# EAGLE board Proiect_TSC v166 (EAGLE 9.7.0)
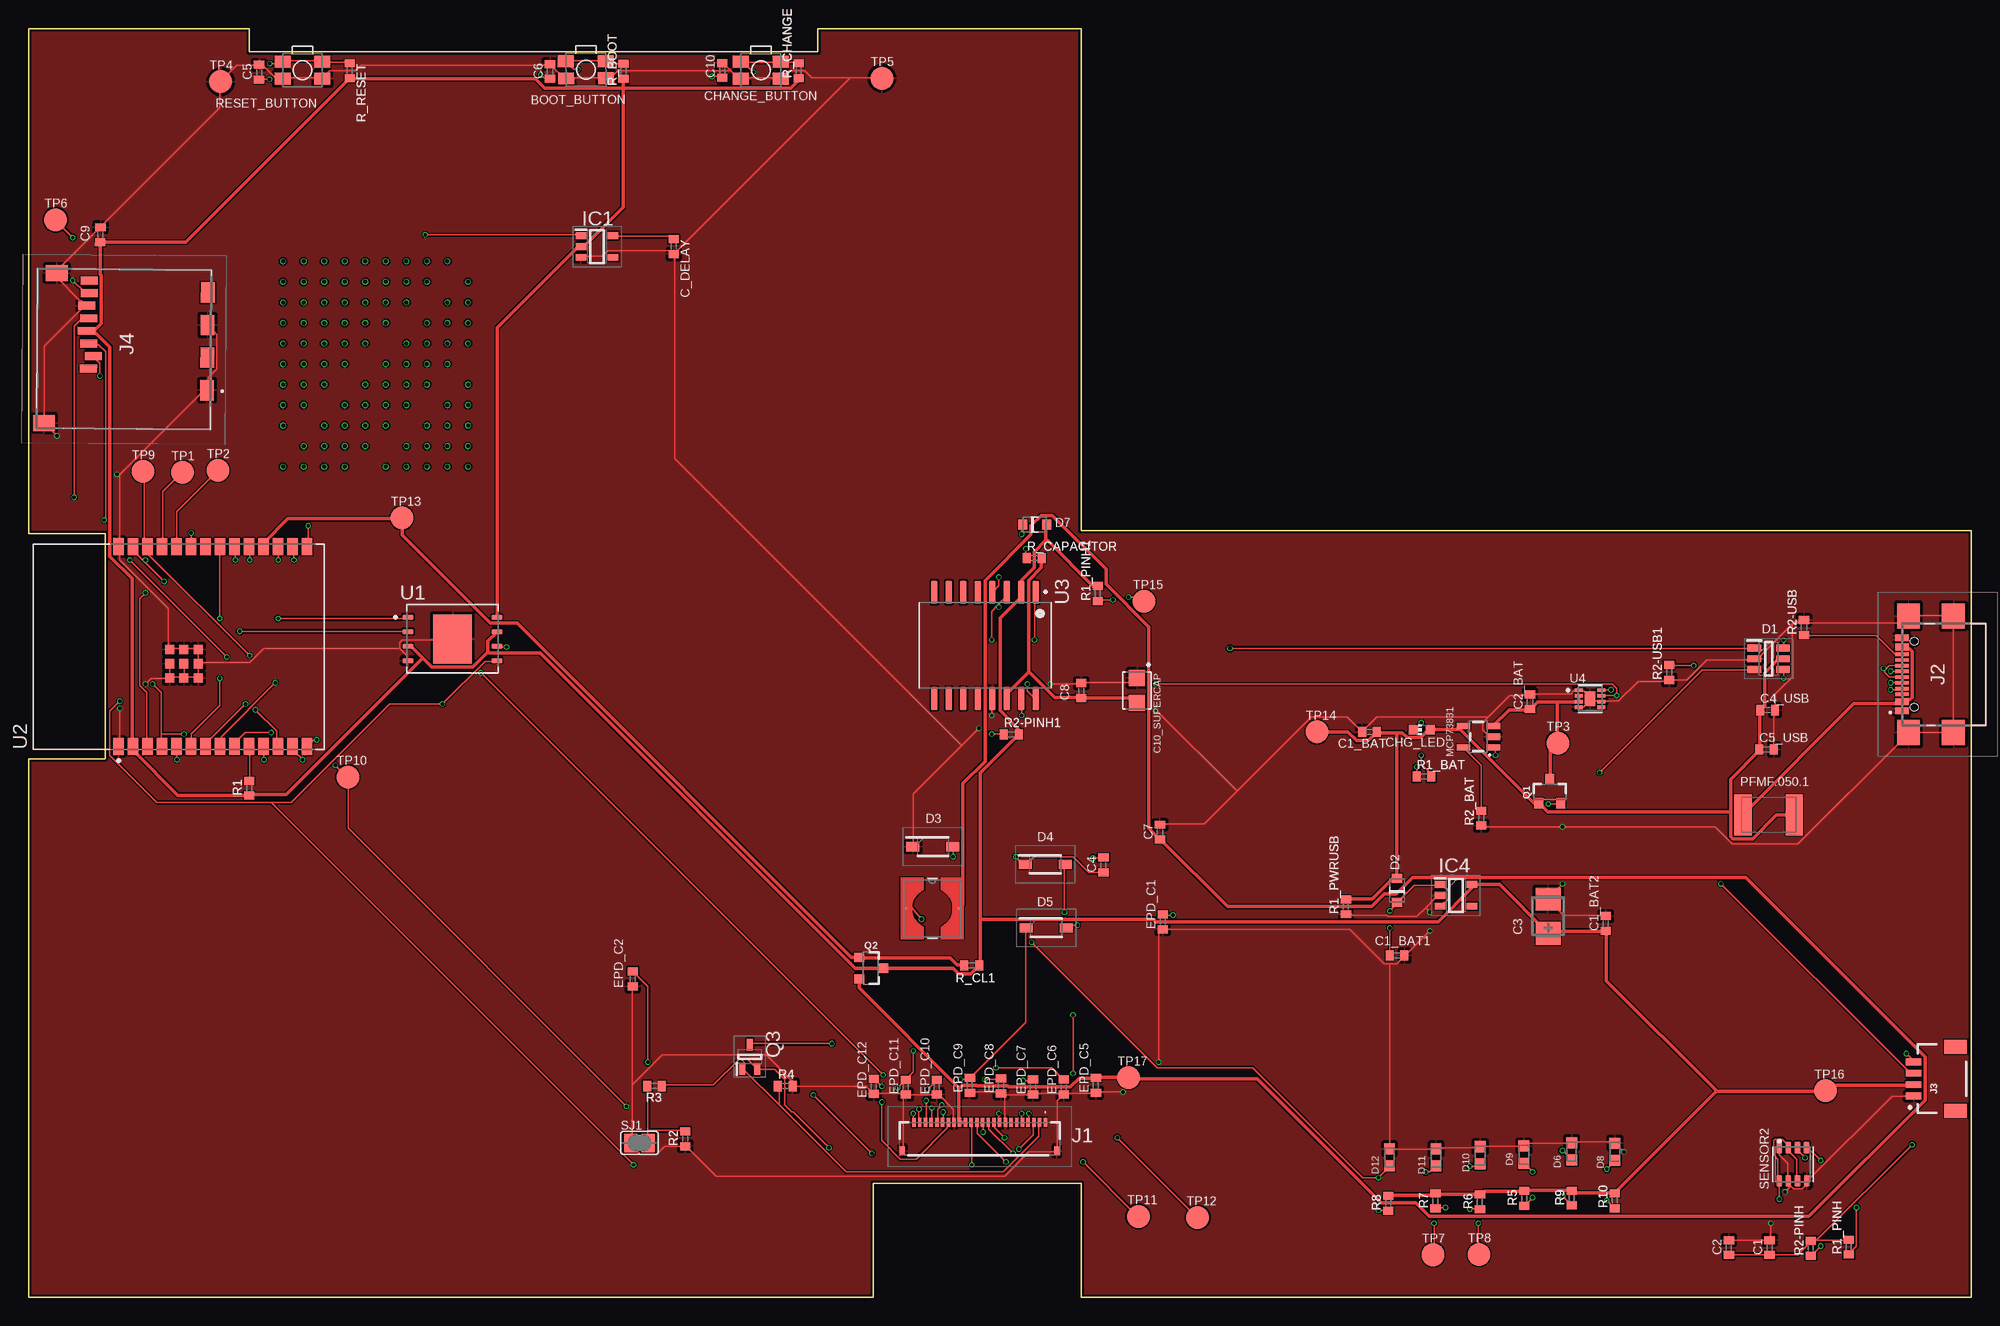
[diagram p0: board, top side]
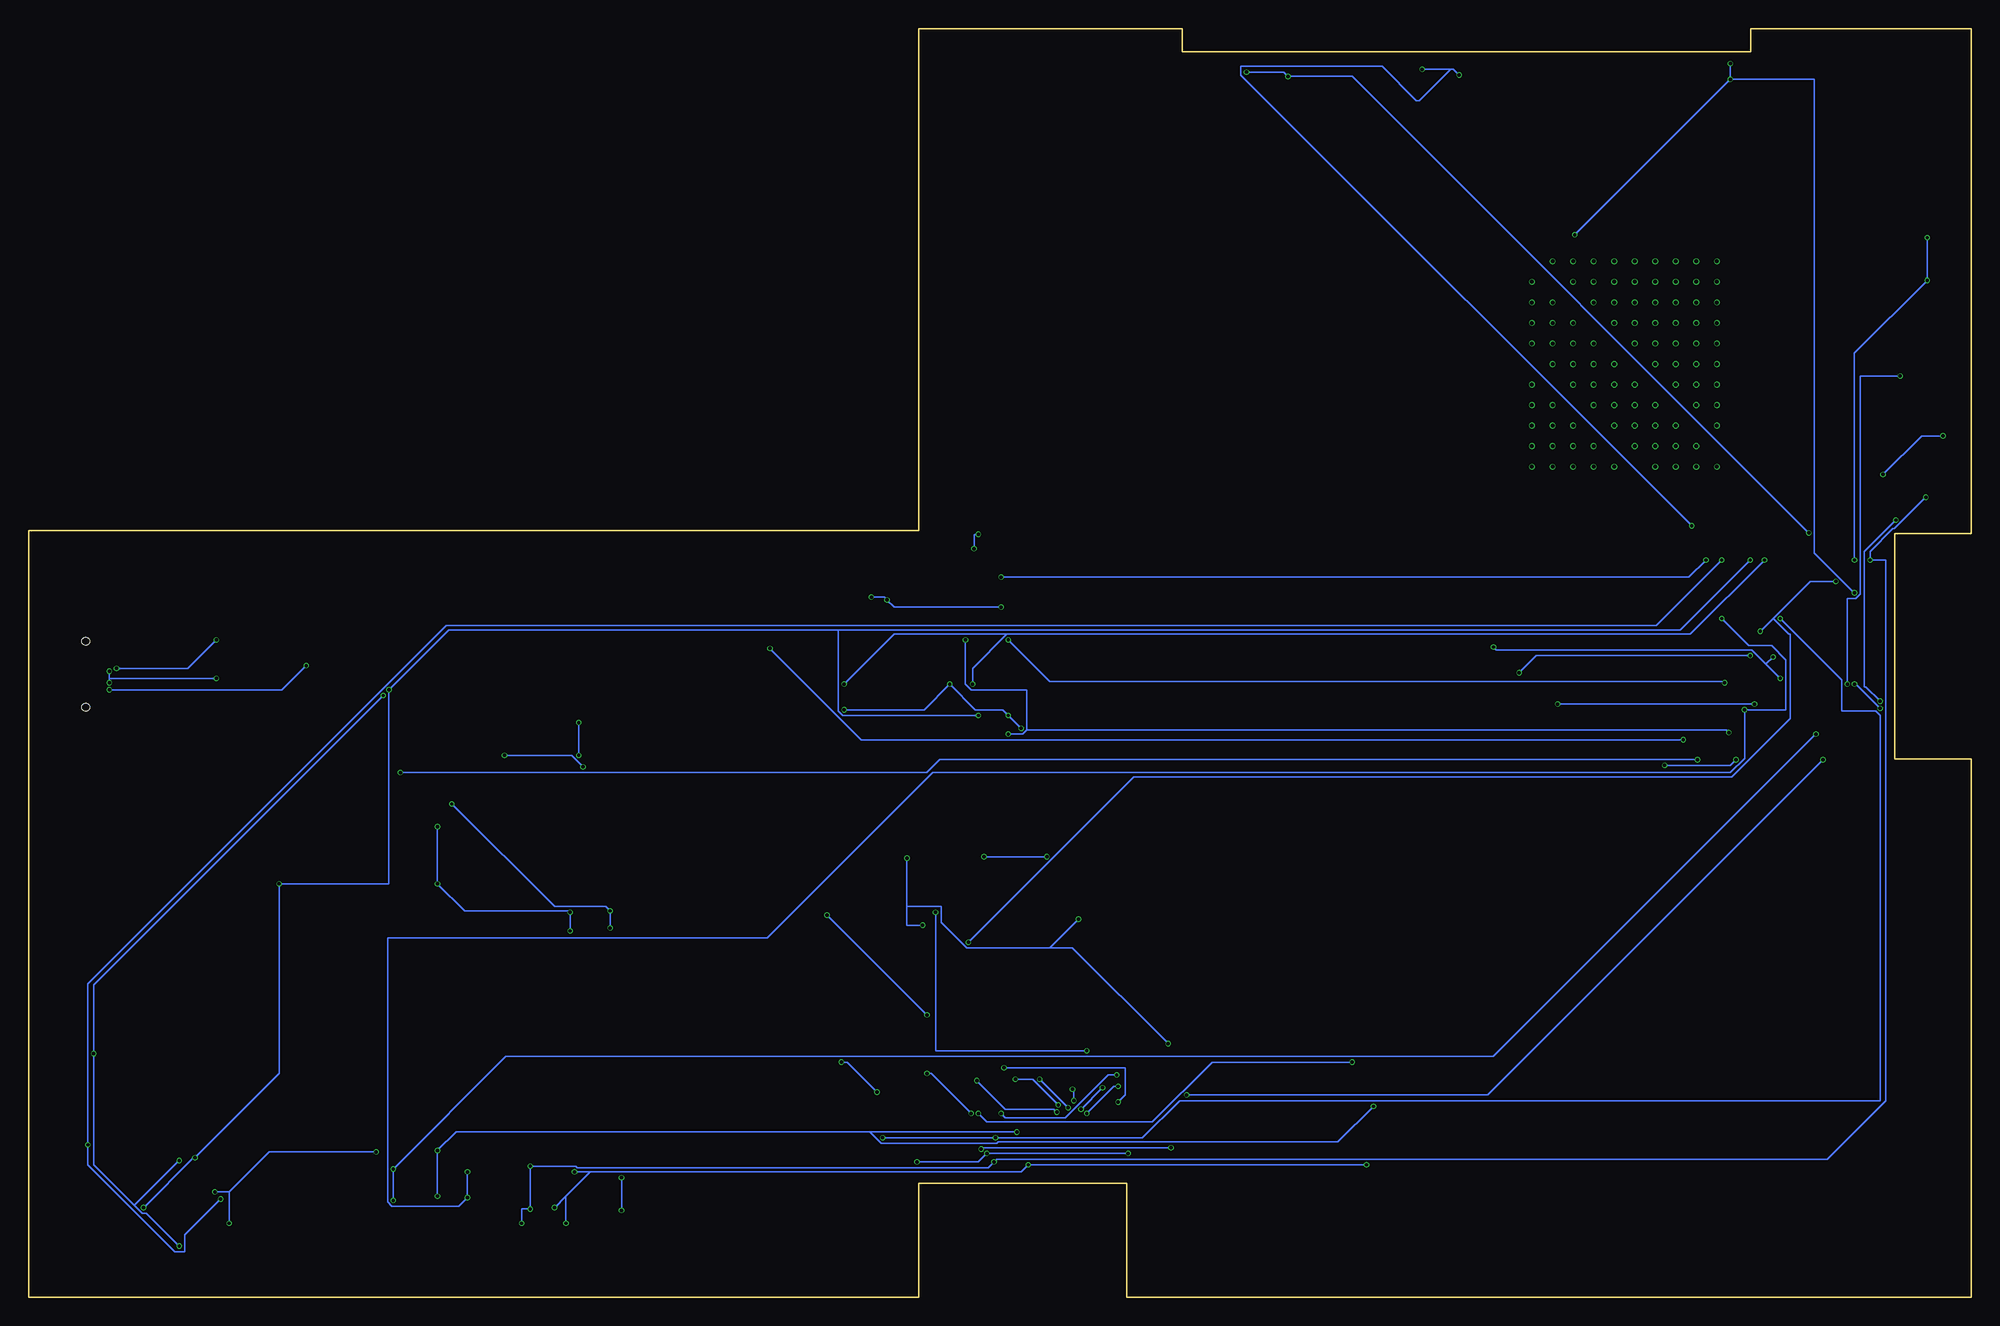
[diagram p1: board, bottom side, seen from below]

Size 170.2 x 111.2 mm. Coordinates in mm from the lower left corner, seen from the top.
Outline: 0,0 74,0 74,10 92.2,10 92.2,0 170.2,0 170.2,67.2 92.2,67.2 92.2,111.2 69.15,111.2 69.15,109.15 19.35,109.15 19.35,111.2 0,111.2 0,66.95 6.7,66.95 6.7,47.2 0,47.2 0,0
Copper layers (1*16): Top / Bottom
Stack-up Default Layer Stack: Top User Defined 0.035mm / Dielectric-1 User Defined 1.6mm / Bottom User Defined 0.035mm
Design rules: minimum copper width classes=1 0.3mm, minimum copper width classes=0 0.15mm, minimum copper width 5mil, minimum drill size 0.3mm, copper clearance wire_polygon to wire_polygon 5mil, copper clearance wire_polygon to pad_smd 5mil, copper clearance wire_polygon to via 5mil, copper clearance pad_smd to pad_smd 5mil, copper clearance pad_smd to via 5mil, copper clearance via to via 5mil, copper clearance smd to pad (same net) 5mil, copper clearance smd to via (same net) 5mil, copper clearance smd to smd (same net) 5mil, dimension clearance 0.2mm, via restrict clearance 0mil, restrict clearance 0mil, drill distance 6mil, keepout clearance 0mil
Net classes: 0 default: width 0.15 mm; 1 POWER: width 0.3 mm

## Footprints (pad centres in the part's own frame; a part is rotated, then mirrored left to right if it is on the bottom)
MYBUTTON = smd 1.4 x 1.05: 1 1.75,0.75; 2 -1.75,0.75; 3 -1.75,-0.75; 4 1.75,-0.75
ESP32_WROVER_EAGLE-LTSPICE_C0402 = smd 0.7 x 0.9: 1 -0.65,0; 2 0.65,0
RCL_CT3528 = smd 2 x 2.2: + -1.5,0; - 1.5,0
CAPCP3225X100N = smd 1.4 x 1.4: 1 -1.1,0; 2 1.1,0
ADAFRUIT_CHIP-LED0603 = smd 0.8 x 0.8: A 0,-0.75; C 0,0.75
SOT95P280X145-6N = smd 1.2 x 0.6: 1 -1.25,0.95; 2 -1.25,0; 3 -1.25,-0.95; 4 1.25,-0.95; 5 1.25,0; 6 1.25,0.95
ESP32_WROVER_AVX---SD0805S020S1R0_AVX_SD0805S020S1R0_0 = smd 0.8 x 0.9: 1 -1.05,0; 2 1.05,0
SOD3716X135N = smd 1.15 x 0.8: 1 -1.75,0; 2 1.75,0
DIOC1608X36N = smd 0.97 x 0.94: 1 -0.75,0; 2 0.75,0
SOT95P280X125-5N = smd 0.9 x 0.6: 1 -1.4,0.95; 2 -1.4,0; 3 -1.4,-0.95; 4 1.4,-0.95; 5 1.4,0.95
SOT95P280X120-5N = smd 0.9 x 0.6: 1 -1.4,0.95; 2 -1.4,0; 3 -1.4,-0.95; 4 1.4,-0.95; 5 1.4,0.95
FH34SRJ24S05SH99 = smd 0.3 x 0.8: 1 5.75,1.45; 2 5.25,1.45; 3 4.75,1.45; 4 4.25,1.45; 5 3.75,1.45; 6 3.25,1.45; 7 2.75,1.45; 8 2.25,1.45; 9 1.75,1.45; 10 1.25,1.45; 11 0.75,1.45; 12 0.25,1.45; 13 -0.25,1.45; 14 -0.75,1.45; 15 -1.25,1.45; 16 -1.75,1.45; 17 -2.25,1.45; 18 -2.75,1.45; 19 -3.25,1.45; 20 -3.75,1.45; 21 -4.25,1.45; 22 -4.75,1.45; 23 -5.25,1.45; 24 -5.75,1.45 | smd 0.4 x 0.8: MP1 6.75,-1.05; MP2 -6.75,-1.05
SAMACSYS_PARTS_USB4110GFA = smd 0.3 x 1.15: A1 -3.35,3.678; A4 -2.55,3.678; A5 -1.25,3.678; A6 -0.25,3.678; A7 0.25,3.678; A8 1.25,3.678; A9 2.55,3.678; A12 3.35,3.678; B1 3.05,3.678; B4 2.25,3.678; B5 1.75,3.678; B6 0.75,3.678; B7 -0.75,3.678; B8 -1.75,3.678; B9 -2.25,3.678; B12 -3.05,3.678 | smd 2.18 x 2: MP1 -5.11,-0.827; MP2 5.11,-0.827; MP3 -5.11,3.103; MP4 5.11,3.103 | hole 0.65: -2.89,2.603; 2.89,2.603
JST04_1MM_RA = smd 0.6 x 1.35: 1 -1.5,0; 2 -0.5,0; 3 0.5,0; 4 1.5,0 | smd 1.2 x 2: NC1 2.8,-3.675; NC2 -2.8,-3.675
112ATAARR03ATTEND = smd 1.8 x 1.2: G1 10.6,10.4; G2 4.9,10.4; S1 7.75,10.4; S2 2.05,10.4 | smd 1.4 x 1.9: G3 13.6,-3.85; G4 0.45,-2.85 | smd 0.7 x 1.5: P1 8.8,0; P2 7.7,0.4; P3 6.6,0; P4 5.5,-0.2; P5 4.4,0; P6 3.3,-0.2; P7 2.2,0; P8 1.1,0
IND_4828-WE-TPC_WRE = smd 0.127 x 0.127: 1 -2.286,0; 2 2.286,0
ESP32_WROVER_SPARKFUN-IC-POWER_SOT23-5 = smd 0.55 x 1.2: 1 -0.95,-1.3; 2 0,-1.3; 3 0.95,-1.3; 4 0.95,1.3; 5 -0.95,1.3
ESP32C6_VARISTOR_CT/CN1812 = smd 1.5 x 3.6: 1 -2.25,0; 2 2.25,0
ESP32_WROVER_SPARKFUN-DISCRETESEMI_SOT23-3 = smd 0.8 x 0.9: 1 -0.95,-1; 2 0.95,-1; 3 0,1.1
SOT65P210X110-3N = smd 1.05 x 0.5: 1 -1.05,0.65; 2 -1.05,-0.65; 3 1.05,0
ESP32_WROVER_EAGLE-LTSPICE_R0402 = smd 0.7 x 0.9: 1 -0.65,0; 2 0.65,0
ESP32_WROVER_BME680_PSON80P300X300X100-8N = smd 1.016 x 0.5: 1 1.458,1.2; 2 1.458,0.4; 3 1.458,-0.4; 4 1.458,-1.2; 5 -1.458,-1.22; 6 -1.458,-0.4; 7 -1.458,0.4; 8 -1.458,1.2
SJ = smd 1.168 x 1.6: 1 -0.762,0; 2 0.762,0
TP20R = smd 2 x 2: TP 0,0
SON127P600X800X80-9N = smd 0.94 x 0.44: 1 -3.895,1.905; 2 -3.895,0.635; 3 -3.895,-0.635; 4 -3.895,-1.905; 5 3.895,-1.905; 6 3.895,-0.635; 7 3.895,0.635; 8 3.895,1.905 | smd 3.4 x 4.3: 9 0,0
XCVR_ESP32-C6-WROOM-1-N8 = smd 1.5 x 0.9: 1 -8.75,5.26; 2 -8.75,3.99; 3 -8.75,2.72; 4 -8.75,1.45; 5 -8.75,0.18; 6 -8.75,-1.09; 7 -8.75,-2.36; 8 -8.75,-3.63; 9 -8.75,-4.9; 10 -8.75,-6.17; 11 -8.75,-7.44; 12 -8.75,-8.71; 13 -8.75,-9.98; 14 -8.75,-11.25; 15 8.75,-11.25; 16 8.75,-9.98; 17 8.75,-8.71; 18 8.75,-7.44; 19 8.75,-6.17; 20 8.75,-4.9; 21 8.75,-3.63; 22 8.75,-2.36; 23 8.75,-1.09; 24 8.75,0.18; 25 8.75,1.45; 26 8.75,2.72; 27 8.75,3.99; 28 8.75,5.26 | smd 0.8 x 0.8: 29_1 -2.755,0.79; 29_2 -1.505,0.79; 29_3 -0.255,0.79; 29_4 -2.755,-0.46; 29_5 -1.505,-0.46; 29_6 -0.255,-0.46; 29_7 -2.755,-1.71; 29_8 -1.505,-1.71; 29_9 -0.255,-1.71
SOIC127P1032X265-16N = smd 2.05 x 0.59: 1 -4.655,4.445; 2 -4.655,3.175; 3 -4.655,1.905; 4 -4.655,0.635; 5 -4.655,-0.635; 6 -4.655,-1.905; 7 -4.655,-3.175; 8 -4.655,-4.445; 9 4.655,-4.445; 10 4.655,-3.175; 11 4.655,-1.905; 12 4.655,-0.635; 13 4.655,0.635; 14 4.655,1.905; 15 4.655,3.175; 16 4.655,4.445
SON50P200X200X80-9N = smd 0.76 x 0.305: 1 -0.985,0.75; 2 -0.985,0.25; 3 -0.985,-0.25; 4 -0.985,-0.75; 5 0.985,-0.75; 6 0.985,-0.25; 7 0.985,0.25; 8 0.985,0.75 | smd 0.9 x 1.3: 9 0,0

## Placement (x,y rotation side)
BOOT_BUTTON  BUTTON_CUSYOMV1  [MYBUTTON]  48.83,107.59 180.3 top
C1  100nF  [ESP32_WROVER_EAGLE-LTSPICE_C0402]  152.52,4.38 90 top
C1_BAT  4.7uF  [ESP32_WROVER_EAGLE-LTSPICE_C0402]  117.47,49.55 180 top
C1_BAT1  4.7uF  [ESP32_WROVER_EAGLE-LTSPICE_C0402]  119.88,29.97 0 top
C1_BAT2  4.7uF  [ESP32_WROVER_EAGLE-LTSPICE_C0402]  138.17,32.77 90 top
C2  100nF  [ESP32_WROVER_EAGLE-LTSPICE_C0402]  148.95,4.38 90 top
C2_BAT  4.7uF  [ESP32_WROVER_EAGLE-LTSPICE_C0402]  131.53,52.2 90 top
C3  100uF TANT  [RCL_CT3528]  133.11,33.4 90 top
C4  4.7uF/25V  [ESP32_WROVER_EAGLE-LTSPICE_C0402]  94.16,37.89 90 top
C4_USB  100nF  [ESP32_WROVER_EAGLE-LTSPICE_C0402]  152.34,51.47 0 top
C5  1uF  [ESP32_WROVER_EAGLE-LTSPICE_C0402]  20.2,107.36 90 top
C5_USB  4.7uF  [ESP32_WROVER_EAGLE-LTSPICE_C0402]  152.25,48.02 0 top
C6  100nF  [ESP32_WROVER_EAGLE-LTSPICE_C0402]  45.68,107.43 90 top
C7  10uF  [ESP32_WROVER_EAGLE-LTSPICE_C0402]  99.12,40.78 90 top
C8  100nF  [ESP32_WROVER_EAGLE-LTSPICE_C0402]  92.21,53.18 90 top
C9  100nF  [ESP32_WROVER_EAGLE-LTSPICE_C0402]  6.29,93.13 88.9 top
C10  100nF  [ESP32_WROVER_EAGLE-LTSPICE_C0402]  60.77,107.53 90 top
C10_SUPERCAP  CPH3225A  [CAPCP3225X100N]  97.09,53.19 270 top
C_DELAY  100nF  [ESP32_WROVER_EAGLE-LTSPICE_C0402]  56.52,92.09 270 top
CHANGE_BUTTON  BUTTON_CUSYOMV1  [MYBUTTON]  64.16,107.56 180 top
CHG_LED  [ADAFRUIT_CHIP-LED0603]  122.04,49.75 90 top
D1  USBLC6-2SC6Y  [SOT95P280X145-6N]  152.43,55.97 0 top
D2  ESP32_WROVER_AVX---SD0805S020S1R0_AVX_SD0805S020S1R0_0_0AVX_SD0805S020S1R0_0_0  [ESP32_WROVER_AVX---SD0805S020S1R0_AVX_SD0805S020S1R0_0]  119.88,35.68 90 top
D3  MBR0530  [SOD3716X135N]  79.22,39.5 0 top
D4  MBR0530  [SOD3716X135N]  89.06,37.95 0 top
D5  MBR0530  [SOD3716X135N]  89.15,32.4 0 top
D6  PGB1010603MR  [DIOC1608X36N]  135.18,12.82 90 top
D7  ESP32_WROVER_AVX---SD0805S020S1R0_AVX_SD0805S020S1R0_0_0AVX_SD0805S020S1R0_0_0  [ESP32_WROVER_AVX---SD0805S020S1R0_AVX_SD0805S020S1R0_0]  88.13,67.73 0 top
D8  PGB1010603MR  [DIOC1608X36N]  138.96,12.77 90 top
D9  PGB1010603MR  [DIOC1608X36N]  130.99,12.52 90 top
D10  PGB1010603MR  [DIOC1608X36N]  127.17,12.47 90 top
D11  PGB1010603MR  [DIOC1608X36N]  123.3,12.27 90 top
D12  PGB1010603MR  [DIOC1608X36N]  119.23,12.27 90 top
EPD_C1  1uF/50V  [ESP32_WROVER_EAGLE-LTSPICE_C0402]  99.36,32.92 90 top
EPD_C2  1uF/50V  [ESP32_WROVER_EAGLE-LTSPICE_C0402]  52.92,27.92 90 top
EPD_C5  0.1uF/50V  [ESP32_WROVER_EAGLE-LTSPICE_C0402]  93.5,18.59 90 top
EPD_C6  1uF/50V  [ESP32_WROVER_EAGLE-LTSPICE_C0402]  90.68,18.45 90 top
EPD_C7  1uF/50V  [ESP32_WROVER_EAGLE-LTSPICE_C0402]  87.99,18.45 90 top
EPD_C8  1uF/50V  [ESP32_WROVER_EAGLE-LTSPICE_C0402]  85.19,18.55 90 top
EPD_C9  1uF/50V  [ESP32_WROVER_EAGLE-LTSPICE_C0402]  82.46,18.6 90 top
EPD_C10  1uF/50V  [ESP32_WROVER_EAGLE-LTSPICE_C0402]  79.56,18.44 90 top
EPD_C11  1uF/50V  [ESP32_WROVER_EAGLE-LTSPICE_C0402]  76.84,18.44 90 top
EPD_C12  1uF/50V  [ESP32_WROVER_EAGLE-LTSPICE_C0402]  74.05,18.49 90 top
IC1  BD5229G-TR  [SOT95P280X125-5N]  49.8,92.09 0 top
IC4  XC6220A331MR-G  [SOT95P280X120-5N]  125.04,35.24 0 top
J1  FH34SRJ-24S-0.5SH_99_  [FH34SRJ24S05SH99]  83.32,13.89 0 top
J2  SAMACSYS_PARTS_USB4110-GF-A  [SAMACSYS_PARTS_USB4110GFA]  167.79,54.61 90 top
J3  QWIIC_RIGHT_ANGLE  [JST04_1MM_RA]  165.12,19.16 90 top
J4  112A-TAAR-R03_ATTEND  [112ATAARR03ATTEND]  5.32,90.2 269.5 top
L1  68uH  [IND_4828-WE-TPC_WRE]  79.17,34.1 0 top
MCP73831  ESP32_WROVER_SPARKFUN-IC-POWER_MCP73831  [ESP32_WROVER_SPARKFUN-IC-POWER_SOT23-5]  127,49.14 90 top
PFMF.050.1  ESP32C6_VARISTORCN1812  [ESP32C6_VARISTOR_CT/CN1812]  152.44,42.3 0 top
Q1  20V/4.2A/52mΩ/1.4W  [ESP32_WROVER_SPARKFUN-DISCRETESEMI_SOT23-3]  133.26,44.31 0 top
Q2  20V/4.2A/52mΩ/1.4W  [ESP32_WROVER_SPARKFUN-DISCRETESEMI_SOT23-3]  73.78,28.86 270 top
Q3  SI1308EDL-T1-GE3  [SOT65P210X110-3N]  63.18,21.1 90 top
R1  10K  [ESP32_WROVER_EAGLE-LTSPICE_R0402]  19.33,44.63 90 top
R1_BAT  200  [ESP32_WROVER_EAGLE-LTSPICE_R0402]  122.24,45.65 0 top
R1_PINH  10K  [ESP32_WROVER_EAGLE-LTSPICE_R0402]  159.46,4.42 90 top
R1_PINH1  10K  [ESP32_WROVER_EAGLE-LTSPICE_R0402]  93.66,61.69 90 top
R1_PWRUSB  100K  [ESP32_WROVER_EAGLE-LTSPICE_R0402]  115.4,34.24 90 top
R2  2.2  [ESP32_WROVER_EAGLE-LTSPICE_R0402]  57.52,13.91 90 top
R2-PINH  10K  [ESP32_WROVER_EAGLE-LTSPICE_R0402]  156.13,4.32 90 top
R2-PINH1  10K  [ESP32_WROVER_EAGLE-LTSPICE_R0402]  86.08,49.34 0 top
R2-USB  5k1  [ESP32_WROVER_EAGLE-LTSPICE_R0402]  155.53,58.72 90 top
R2-USB1  5k1  [ESP32_WROVER_EAGLE-LTSPICE_R0402]  143.72,54.77 90 top
R2_BAT  2K  [ESP32_WROVER_EAGLE-LTSPICE_R0402]  127.25,42 90 top
R3  0.47  [ESP32_WROVER_EAGLE-LTSPICE_R0402]  54.84,18.53 180 top
R4  10K  [ESP32_WROVER_EAGLE-LTSPICE_R0402]  66.3,18.53 0 top
R5  10K  [ESP32_WROVER_EAGLE-LTSPICE_R0402]  131.02,8.68 90 top
R6  10K  [ESP32_WROVER_EAGLE-LTSPICE_R0402]  127.14,8.38 90 top
R7  10K  [ESP32_WROVER_EAGLE-LTSPICE_R0402]  123.24,8.46 90 top
R8  10K  [ESP32_WROVER_EAGLE-LTSPICE_R0402]  119.11,8.26 90 top
R9  10K  [ESP32_WROVER_EAGLE-LTSPICE_R0402]  135.18,8.71 90 top
R10  10K  [ESP32_WROVER_EAGLE-LTSPICE_R0402]  138.96,8.48 90 top
R_BOOT  10K  [ESP32_WROVER_EAGLE-LTSPICE_R0402]  52.12,107.47 90 top
R_CAPACITOR  15  [ESP32_WROVER_EAGLE-LTSPICE_R0402]  88.1,64.79 0 top
R_CHANGE  10K  [ESP32_WROVER_EAGLE-LTSPICE_R0402]  67.47,107.49 90 top
R_CL1  10K  [ESP32_WROVER_EAGLE-LTSPICE_R0402]  82.63,29.1 180 top
R_RESET  10K  [ESP32_WROVER_EAGLE-LTSPICE_R0402]  28.14,107.49 270 top
RESET_BUTTON  BUTTON_CUSYOMV1  [MYBUTTON]  24,107.56 180 top
SENSOR2  BME688  [ESP32_WROVER_BME680_PSON80P300X300X100-8N]  154.56,11.67 90 top
SJ1  [SJ]  53.52,13.54 0 top
TP1  TPTP20R  [TP20R]  13.49,72.31 0 top
TP2  TPTP20R  [TP20R]  16.59,72.49 0 top
TP3  TPTP20R  [TP20R]  133.96,48.59 0 top
TP4  TPTP20R  [TP20R]  16.83,106.54 0 top
TP5  TPTP20R  [TP20R]  74.75,106.84 0 top
TP6  TPTP20R  [TP20R]  2.37,94.44 0 top
TP7  TPTP20R  [TP20R]  123.04,3.74 0 top
TP8  TPTP20R  [TP20R]  127.06,3.77 0 top
TP9  TPTP20R  [TP20R]  10.03,72.39 0 top
TP10  TPTP20R  [TP20R]  27.97,45.61 0 top
TP11  TPTP20R  [TP20R]  97.22,7.11 0 top
TP12  TPTP20R  [TP20R]  102.42,7.01 0 top
TP13  TPTP20R  [TP20R]  32.72,68.31 0 top
TP14  TPTP20R  [TP20R]  112.87,49.56 0 top
TP15  TPTP20R  [TP20R]  97.72,61.01 0 top
TP16  TPTP20R  [TP20R]  157.42,18.11 0 top
TP17  TPTP20R  [TP20R]  96.37,19.26 0 top
U1  W25Q512JVEIQ  [SON127P600X800X80-9N]  37.14,57.71 0 top
U2  ESP32-C6-WROOM-1-N8  [XCVR_ESP32-C6-WROOM-1-N8]  13.15,57.04 90 top
U3  DS3231SN#  [SOIC127P1032X265-16N]  83.8,57.15 270 top
U4  MAX17048G+T10  [SON50P200X200X80-9N]  136.79,52.47 0 top

## Library data of the parts
BOOT_BUTTON CHANGE_BUTTON CHG_LED PFMF.050.1 RESET_BUTTON SJ1 TP1-TP17 = deskassistant_v19_v1
C1 C1_BAT C1_BAT1 C1_BAT2 C2 C2_BAT C4 C4_USB C5 C5_USB C6-C10 C_DELAY EPD_C1 EPD_C2 EPD_C5-EPD_C12 = deskassistant_v19_v1; SPICEMODEL: NONE; SPICEPREFIX: C
C3 = deskassistant_v19_v1; SPICEPREFIX: C
C10_SUPERCAP = deskassistant_v19_v1; AVAILABILITY: Not in stock; CHECK_PRICES: https://www.snapeda.com/parts/CPH3225A/Seiko+Instruments/view-part/?ref=eda; DESCRIPTION: 11 mF (EDLC) Supercapacitor 3.3 V 1210 (3225 Metric) - -; MF: Seiko Instruments; MP: CPH3225A; PACKAGE: 1210 Seiko; PRICE: None; PURCHASE-URL: https://www.snapeda.com/api/url_track_click_mouser/?unipart_id=562593&manufacturer=Seiko Instruments&part_name=CPH3225A&search_term=None; SNAPEDA_LINK: https://www.snapeda.com/parts/CPH3225A/Seiko+Instruments/view-part/?ref=snap
D1 = deskassistant_v19_v1; AVAILABILITY: In Stock; CHECK_PRICES: https://www.snapeda.com/parts/USBLC6-2SC6Y/STMicroelectronics/view-part/?ref=eda; DESCRIPTION: 17V Clamp 5A (8/20µs) Ipp Tvs Diode Surface Mount SOT-23-6; MF: STMicroelectronics; MP: USBLC6-2SC6Y; PACKAGE: SOT-23-6 STMicroelectronics; PRICE: None; SNAPEDA_LINK: https://www.snapeda.com/parts/USBLC6-2SC6Y/STMicroelectronics/view-part/?ref=snap
D2 D7 = deskassistant_v19_v1; CENTROID_NOT_SPECIFIED: No; DATASHEET: http://datasheets.avx.com/schottky.pdf; DIGIKEY_DESCRIPTION: DIODE SCHOTTKY 20V 1A 0805; DIGIKEY_PART_NUMBER: 478-7800-1-ND; LEAD_FREE: yes; MF: AVX; MOUSER_PART_NUMBER: 581-SD0805S020S1R0; PACKAGE: 0805 (2012 metric); PREFIX: D; ROHS: yes; TEMPERATURE_RANGE_HIGH: +125°C; TEMPERATURE_RANGE_LOW: -55°C
D3-D5 = deskassistant_v19_v1; AVAILABILITY: In Stock; CHECK_PRICES: https://www.snapeda.com/parts/MBR0530/Onsemi/view-part/?ref=eda; DESCRIPTION: Diode Schottky 30 V 500mA Surface Mount SOD-123; MF: ON Semiconductor; MP: MBR0530; PACKAGE: SOD-123-2 ON Semiconductor; PRICE: None; PURCHASE-URL: https://www.snapeda.com/api/url_track_click_mouser/?unipart_id=179458&manufacturer=ON Semiconductor&part_name=MBR0530&search_term=None; SNAPEDA_LINK: https://www.snapeda.com/parts/MBR0530/Onsemi/view-part/?ref=snap
D6 D8-D12 = deskassistant_v19_v1; AVAILABILITY: In Stock; CHECK_PRICES: https://www.snapeda.com/parts/PGB1010603MR/Littelfuse/view-part/?ref=eda; DESCRIPTION: 150V (Typ) Clamp - Ipp Tvs Diode Surface Mount 0603 (1608 Metric); MF: Littelfuse Inc.; MP: PGB1010603MR; PACKAGE: 0603 Littelfuse Inc.; PRICE: None; PURCHASE-URL: https://www.snapeda.com/api/url_track_click_mouser/?unipart_id=5659453&manufacturer=Littelfuse Inc.&part_name=PGB1010603MR&search_term=None; SNAPEDA_LINK: https://www.snapeda.com/parts/PGB1010603MR/Littelfuse/view-part/?ref=snap
IC1 = deskassistant_v19_v1; DESCRIPTION: Voltage Detector with Adjustable Delay Time: CMOS processes are utilized to develop high precision, low current consumption CMOS reset ICs that allow arbitrary setting of the delay time. The extensive lineup includes both Nch Open Drain and CMOS output types in a wide range of detection voltages (from 2.3V to 6.0V, in 0.1V steps), enabling selection of the ideal solution based on customer requirements. In addition, the entire series is of course both lead-free and RoHS-compliant.; HEIGHT: 1.25mm; MANUFACTURER_NAME: ROHM Semiconductor; MANUFACTURER_PART_NUMBER: BD5229G-TR; MOUSER_PART_NUMBER: 755-BD5229G-TR; MOUSER_PRICE-STOCK: https://www.mouser.co.uk/ProductDetail/ROHM-Semiconductor/BD5229G-TR?qs=4kLU8WoGk0vvnhrrYwdszw%3D%3D
IC4 = deskassistant_v19_v1; DESCRIPTION: LDO Voltage Regulators; HEIGHT: 1.2mm; MANUFACTURER_NAME: Torex; MANUFACTURER_PART_NUMBER: XC6220A331MR-G; MOUSER_PART_NUMBER: 865-XC6220A331MR-G; MOUSER_PRICE-STOCK: https://www.mouser.co.uk/ProductDetail/Torex-Semiconductor/XC6220A331MR-G?qs=AsjdqWjXhJ8ZSWznL1J0gg%3D%3D
J1 = deskassistant_v19_v1; DESCRIPTION: 24 Position FFC, FPC Connector Contacts, Top and Bottom 0.020" (0.50mm) Surface Mount, Right Angle; HEIGHT: 1.1mm; MANUFACTURER_NAME: Hirose; MANUFACTURER_PART_NUMBER: FH34SRJ-24S-0.5SH(99); MOUSER_PART_NUMBER: 798-FH34SRJ24S05SH99; MOUSER_PRICE-STOCK: https://www.mouser.co.uk/ProductDetail/Hirose-Connector/FH34SRJ-24S-0.5SH99?qs=vcbW%252B4%252BSTIpKBl5ap9J8Fw%3D%3D
J2 = deskassistant_v19_v1; DESCRIPTION: CONN USB 2.0 TYPE-C R/A SMT; HEIGHT: 3.26mm; MANUFACTURER_NAME: GCT (GLOBAL CONNECTOR TECHNOLOGY); MANUFACTURER_PART_NUMBER: USB4110-GF-A; MOUSER_PART_NUMBER: 640-USB4110-GF-A; MOUSER_PRICE-STOCK: https://www.mouser.co.uk/ProductDetail/GCT/USB4110-GF-A?qs=KUoIvG%2F9IlYiZvIXQjyJeA%3D%3D
J3 = deskassistant_v19_v1; PROD_ID: CONN-13694
J4 = deskassistant_v19_v1; DESCRIPTION: Micro SD Card Socket, Push-Push Type, Top Mount, SMT, H=1.83mm, 10u; HEIGHT: 1.9mm; MANUFACTURER_NAME: ATTEND; MANUFACTURER_PART_NUMBER: 112A-TAAR-R03 ATTEND
L1 = deskassistant_v19_v1; COPYRIGHT: Copyright (C) 2024 Ultra Librarian. All rights reserved.; MANUFACTURER_PART_NUMBER: 744043680; MFR_NAME: Wurth Electronics
MCP73831 = deskassistant_v19_v1; PROD_ID: IC-09995
Q1 = deskassistant_v19_v1; PROD_ID: TRAN-14388
Q2 = deskassistant_v19_v1; PROD_ID: TRAN-14388; THERMALLOSS: 2305 UX
Q3 = deskassistant_v19_v1; AVAILABILITY: In Stock; CHECK_PRICES: https://www.snapeda.com/parts/SI1308EDL-T1-GE3/Vishay+Siliconix/view-part/?ref=eda; DESCRIPTION: Si1308EDL-T1-GE3 N-channel MOSFET Transistor, 1.5 A, 30 V, 3-Pin SC-70 | Siliconix / Vishay SI1308EDL-T1-GE3; MF: Vishay Siliconix; MP: SI1308EDL-T1-GE3; PACKAGE: SOT-323 Vishay Semiconductor; PRICE: None; PURCHASE-URL: https://www.snapeda.com/api/url_track_click_mouser/?unipart_id=274603&manufacturer=Vishay Siliconix&part_name=SI1308EDL-T1-GE3&search_term=None; SNAPEDA_LINK: https://www.snapeda.com/parts/SI1308EDL-T1-GE3/Vishay+Siliconix/view-part/?ref=snap
R1 R1_BAT R1_PINH R1_PINH1 R1_PWRUSB R2 R2-PINH R2-PINH1 R2-USB R2-USB1 R2_BAT R3-R10 R_BOOT R_CAPACITOR R_CHANGE R_CL1 R_RESET = deskassistant_v19_v1; SPICEMODEL: NONE; SPICEPREFIX: R
SENSOR2 = deskassistant_v19_v1; AVAILABILITY: Unavailable; DESCRIPTION: Integrated Environmental Unit; MF: Bosch Sensortec; MP: BME680; PACKAGE: LGA-8 Bosch Tools; PRICE: None
U1 = deskassistant_v19_v1; AVAILABILITY: In Stock; CHECK_PRICES: https://www.snapeda.com/parts/W25Q512JVEIQ/Winbond+Electronics/view-part/?ref=eda; DESCRIPTION: FLASH - NOR Memory IC 512Mb (64M x 8) SPI - Quad I/O 133 MHz 8-WSON (8x6); MF: Winbond Electronics; MP: W25Q512JVEIQ; PACKAGE: Package; PRICE: None; SNAPEDA_LINK: https://www.snapeda.com/parts/W25Q512JVEIQ/Winbond+Electronics/view-part/?ref=snap
U2 = deskassistant_v19_v1; AVAILABILITY: In Stock; CHECK_PRICES: https://www.snapeda.com/parts/ESP32-C6-WROOM-1-N8/Espressif+Systems/view-part/?ref=eda; DESCRIPTION: Multiprotocol Modules ESP32-C6 module, Wi-Fi 6 in 2.4 GHz band, Bluetooth 5, Zigbee 3.0 and Thread. ESP34-WROOM Compatible - ENGINEERING SAMPLE; MF: Espressif Systems; MP: ESP32-C6-WROOM-1-N8; PACKAGE: None; PRICE: None; SNAPEDA_LINK: https://www.snapeda.com/parts/ESP32-C6-WROOM-1-N8/Espressif+Systems/view-part/?ref=snap
U3 = deskassistant_v19_v1; AVAILABILITY: In Stock; CHECK_PRICES: https://www.snapeda.com/parts/DS3231SN%23/Analog+Devices/view-part/?ref=eda; DESCRIPTION: Extremely Accurate I²C-Integrated RTC/TCXO/Crystal; MF: Analog Devices; MP: DS3231SN#; PACKAGE: SOIC-16 Maxim; PRICE: None; PURCHASE-URL: https://www.snapeda.com/api/url_track_click_mouser/?unipart_id=99048&manufacturer=Analog Devices&part_name=DS3231SN#&search_term=None; SNAPEDA_LINK: https://www.snapeda.com/parts/DS3231SN%23/Analog+Devices/view-part/?ref=snap
U4 = deskassistant_v19_v1; AVAILABILITY: In Stock; CHECK_PRICES: https://www.snapeda.com/parts/MAX17048G+T10/Analog+Devices/view-part/?ref=eda; DESCRIPTION: 3µA 1-Cell/2-Cell Fuel Gauge with ModelGauge; MF: Analog Devices; MP: MAX17048G+T10; PACKAGE: TDFN-8 Maxim; PRICE: None; PURCHASE-URL: https://www.snapeda.com/api/url_track_click_mouser/?unipart_id=329239&manufacturer=Analog Devices&part_name=MAX17048G+T10&search_term=None; SNAPEDA_LINK: https://www.snapeda.com/parts/MAX17048G+T10/Analog+Devices/view-part/?ref=snap

## Nets
3V3 [POWER]: C1_BAT2.1 C3.+ C9.1 D7.2 IC1.2 IC4.5 J3.2 J4.P4 Q2.3 R1.1 R1_PINH1.2 R2-PINH1.2 R5.2 R6.2 R7.2 R8.2 R9.2 R10.2 R_BOOT.1 R_CHANGE.1 R_CL1.1 R_RESET.2 TP16.TP U1.3 U1.7 U1.8 U2.2 U3.2
32KHZ: R2-PINH1.1 U2.9 U3.1
DN: D1.4 J2.A7 J2.B7
DP: D1.6 J2.A6 J2.B6
EPD_3V3 [POWER]: C7.1 EPD_C5.2 J1.15 J1.16 L1.2 Q2.2 TP17.TP
EPD_3V3_C [POWER]: Q2.1 R_CL1.2 TP13.TP U2.18
EPD_BUSY: J1.9 TP9.TP U2.26
EPD_CS: D6.1 J1.12 R9.1 TP10.TP U2.11
EPD_DC: J1.11 TP11.TP U2.5
EPD_RST: J1.10 TP12.TP U2.21
FLASH_CS: D9.1 R5.1 U1.1 U2.12
GDR: J1.2 Q3.1 R4.1
GND: BOOT_BUTTON.1 BOOT_BUTTON.2 C1.2 C1_BAT1.2 C1_BAT2.2 C1_BAT.2 C2.2 C2_BAT.2 C3.- C4_USB.2 C5.2 C5_USB.2 C6.2 C7.2 C8.2 C9.2 C10.2 C10_SUPERCAP.1 C_DELAY.2 CHANGE_BUTTON.1 CHANGE_BUTTON.2 D1.2 D3.1 D6.2 D8.2 D9.2 D10.2 D11.2 D12.2 EPD_C1.1 EPD_C2.1 EPD_C5.1 EPD_C6.1 EPD_C7.1 EPD_C8.1 EPD_C9.1 EPD_C10.1 EPD_C11.1 EPD_C12.1 IC1.3 IC4.2 J1.8 J1.17 J1.MP1 J1.MP2 J2.A1 J2.A12 J2.B1 J2.B12 J2.MP1 J2.MP2 J2.MP3 J2.MP4 J3.1 J4.G1 J4.G2 J4.G3 J4.G4 J4.P6 MCP73831.2 R1_PWRUSB.1 R2-USB1.1 R2-USB.2 R2.1 R2_BAT.1 R4.2 RESET_BUTTON.1 RESET_BUTTON.2 SENSOR2.1 SENSOR2.5 SENSOR2.7 SJ1.1 TP4.TP TP5.TP U1.4 U1.9 U2.1 U2.28 U2.29_1 U2.29_2 U2.29_3 U2.29_4 U2.29_5 U2.29_6 U2.29_7 U2.29_8 U2.29_9 U3.13 U4.1 U4.4 U4.6 U4.9
GPIO8: R1.2 U2.10
I2C_PW: C1.1 C2.1 R1_PINH.2 R2-PINH.2 SENSOR2.2 SENSOR2.6 SENSOR2.8 U2.17
INT_RTC: R1_PINH1.1 TP15.TP U2.8 U3.3
IO/BOOT: BOOT_BUTTON.3 BOOT_BUTTON.4 C6.1 R_BOOT.2 U2.15
IO/CHANGE: C10.1 CHANGE_BUTTON.3 CHANGE_BUTTON.4 R_CHANGE.2 U2.23
MISO: D12.1 J4.P7 R8.1 TP6.TP U1.2 U2.27
MOSI: D11.1 J1.14 J4.P3 R7.1 TP7.TP U1.5 U2.7
N$1: J2.A5 R2-USB1.2
N$2: J2.B5 R2-USB.1
N$3: C1_BAT1.1 D2.1 IC4.1 IC4.3 Q1.2
N$4: C4.1 D3.2 D4.1
N$6: MCP73831.1 R1_BAT.1
N$7: CHG_LED.C R1_BAT.2
N$8: MCP73831.5 R2_BAT.2
N$10: EPD_C12.2 J1.24
N$11: EPD_C10.2 J1.22
N$12: EPD_C7.2 J1.19
N$13: EPD_C8.2 J1.20
N$14: EPD_C6.2 J1.18
N$15: EPD_C2.2 J1.5
N$16: EPD_C1.2 J1.4
N$17: C_DELAY.1 IC1.5
N$18: D7.1 R_CAPACITOR.1
PREVGH: D5.1 EPD_C9.2 J1.21
PREVGL: D4.2 EPD_C11.2 J1.23
RESE: J1.3 Q3.2 R3.1
RESE': R2.2 R3.2 SJ1.2
RESET: C5.1 IC1.1 R_RESET.1 RESET_BUTTON.3 RESET_BUTTON.4 U2.3
RTC_RST: U2.16 U3.4
RX: TP2.TP U2.24
SCK: D10.1 J1.13 J4.P5 R6.1 TP8.TP U1.6 U2.6
SCL: J3.4 R2-PINH.1 SENSOR2.4 U2.20 U3.16 U4.7
SDA: J3.3 R1_PINH.1 SENSOR2.3 U2.19 U3.15 U4.8
SRC: C4.2 D5.2 L1.1 Q3.3
SS_SD: D8.1 J4.P2 R10.1 U2.4
TX: TP1.TP U2.25
USB_D+: D1.1 U2.14
USB_D-: D1.3 U2.13
VBAT [POWER]: C2_BAT.1 MCP73831.3 Q1.3 TP3.TP U4.2 U4.3
VBUS [POWER]: C1_BAT.1 C4_USB.1 C5_USB.1 CHG_LED.A D1.5 D2.2 MCP73831.4 PFMF.050.1.2 Q1.1 R1_PWRUSB.2 TP14.TP
VRTC [POWER]: C8.1 C10_SUPERCAP.2 R_CAPACITOR.2 U3.14
VUSB [POWER]: J2.A4 J2.A9 J2.B4 J2.B9 PFMF.050.1.1

## Tracks (layer width: path | path; a pad name or v marks a point on that pad's centre or on a via)
3V3
  Top 0.3: 34.52,56.03 35.32,55.23 38.92,55.23 40.23,56.55 | 34.52,56.03 33.52,57.03 33.31,57.03 U1.3 | 40.23,56.55 40.23,57.52 41,58.28 U1.7 | 34.52,56.03 22.58,44.08 19.46,44.08 R1.1 19.32,44.01 13.09,44.01 9.21,47.89 9.21,48.24 U2.2 9.07,48.37 9.07,62.99 7.13,64.92 7.13,83.28 5.82,84.59 J4.P4 5.12,84.73 5.75,84.73 6.37,85.35 6.37,89.58 6.3,89.65 6.3,92.42 C9.1 6.44,92.49 13.78,92.49 28.05,106.75 R_RESET.2 28.18,106.82 44.39,106.82 45.22,105.99 52.08,105.99 | 52.08,105.99 52.08,106.75 R_BOOT.1 | 52.08,105.99 52.08,95.53 48.68,92.14 48.41,92.14 IC1.2 48.27,92.21 41.06,85.01 41.06,59.66 U1.8 | 52.08,105.99 66.76,105.99 67.45,106.68 67.45,106.82 R_CHANGE.1 | 89.12,66.38 89.12,67.69 D7.2 | 89.12,66.38 88.09,65.34 88.09,63.95 86.98,62.85 86.98,61.95 U3.2 86.91,61.74 86.91,61.32 85.11,59.52 85.11,51.42 86.7,49.83 86.7,49.34 R2-PINH1.2 86.63,49.2 83.38,45.95 83.38,33.14 | R1_PINH1.2 93.63,62.36 93.21,62.36 89.26,66.31 89.12,66.38 | 83.38,33.14 83.38,29.19 R_CL1.1 83.24,29.05 82.55,28.36 81.51,28.36 81.02,28.85 74.93,28.85 Q2.3 74.72,28.85 72.44,28.85 44.8,56.48 40.37,56.48 40.23,56.55 | J3.2 165.09,18.6 157.96,18.6 157.47,18.11 TP16.TP 157.34,18.04 147.85,18.04 | R8.2 119.11,8.97 123.06,8.97 123.2,9.11 R7.2 123.33,9.04 127.07,9.04 R6.2 127.28,9.04 127.56,9.32 130.95,9.32 R5.2 131.16,9.39 135.04,9.39 R9.2 135.25,9.32 135.38,9.18 138.92,9.18 R10.2 139.05,9.25 147.85,18.04 | 147.85,18.04 147.78,18.18 138.22,27.74 138.22,31.96 C1_BAT2.1 138.15,32.1 133.17,32.1 C3.+ 133.1,31.96 128.87,36.19 IC4.5 126.38,36.05 126.38,35.84 123.47,32.93 98.75,32.93 98.54,33.14 83.38,33.14
32KHZ  (via drill 0.3)
  Top 0.15: v84.38,49.38 85.38,49.38 R2-PINH1.1 | v88.12,57.62 88.12,61.75 U3.1 | v21.25,49.5 19,49.5 18.12,48.62 18.12,48.38 U2.9
  Bottom 0.15: v84.38,49.38 83.12,49.38 82.75,49.75 | 82.75,49.75 82.75,53.25 87.62,53.25 88.12,53.75 v88.12,57.62 | v21.25,49.5 21.5,49.75 82.75,49.75
DN  (via drill 0.3)
  Top 0.15: v163.12,53.88 164,53.88 J2.B7 | v163.12,54.88 164,54.88 J2.A7 | v153.75,54.25 153.75,55 D1.4
  Bottom 0.15: v163.12,54.88 163.12,54.25 | 163.12,54.25 v163.12,53.88 | 163.12,54.25 v153.75,54.25
DP  (via drill 0.3)
  Top 0.15: 162.62,55 162.62,54.75 163,54.38 164,54.38 J2.A6 | 162.62,55 163,55.38 164,55.38 J2.B6 | v153.75,57.62 153.75,57 D1.6 | 162.62,55 v162.5,55.12
  Bottom 0.15: v153.75,57.62 156.25,55.12 v162.5,55.12
EPD_3V3
  Top 0.3: J1.15 J1.16 81.51,15.48 81.51,18.39 | 81.51,18.39 72.78,27.11 72.78,27.88 Q2.2 | 81.51,18.39 81.65,18.46 81.78,18.6 83.03,18.6 83.1,18.53 85.8,18.53 85.87,18.46 91.27,18.46 92.03,19.22 93.35,19.22 EPD_C5.2 93.56,19.29 96.33,19.29 TP17.TP 96.47,19.15 107.61,19.15 118.49,8.28 121.53,8.28 122.71,7.1 155.95,7.1 166.13,17.28 166.13,21.09 150.41,36.81 121.26,36.81 119.8,35.36 118.76,35.36 117.66,34.25 105.05,34.25 99.23,40.06 C7.1 99.1,40.13 98.13,41.1 98.13,58.76 94.39,62.5 94.39,63.82 89.68,68.53 88.71,68.53 87.81,67.63 87.81,66.86 83.79,62.85 83.79,46.99 81.85,45.05 81.85,34.45 81.51,34.11 L1.2
EPD_3V3_C
  Top 0.3: R_CL1.2 81.92,29.12 81.37,29.12 80.75,29.75 72.78,29.75 Q2.1 72.64,29.82 72.09,29.82 42.8,59.11 40.44,59.11 32.76,66.79 32.76,68.11 TP13.TP 32.69,68.25 22.71,68.25 20.64,66.17 20.64,65.83 U2.18
EPD_BUSY  (via drill 0.3)
  Top 0.15: v85,16.12 85,15.38 J1.9 | v39.62,54.75 v74.88,19.5 | v19.38,56.25 10.5,65.12 10.5,65.75 U2.26 10.38,65.88 10.12,66.12 10.12,72.38 TP9.TP
  Bottom 0.15: v85,16.12 84.62,15.75 79.38,15.75 75.62,19.5 v74.88,19.5 | v39.62,54.75 38.12,56.25 v19.38,56.25
EPD_CS  (via drill 0.3)
  Top 0.15: v20.62,47.12 20.62,48.25 U2.11 | v26.88,46.62 27.88,45.62 TP10.TP 28,45.5 28,41.12 v52.38,16.75 | v83.62,14.5 83.62,15.25 J1.12 | D6.1 v134.38,12.88 | v134.38,8.88 135.12,8.12 R9.1
  Bottom 0.15: v20.62,47.12 21.12,46.62 v26.88,46.62 | 96.5,14.5 132.75,14.5 v134.38,12.88 v134.38,8.88 | 96.5,14.5 v83.62,14.5 | v52.38,16.75 55.5,13.62 85.25,13.62 85.38,13.5 95.5,13.5 96.5,14.5
EPD_DC  (via drill 0.3)
  Top 0.15: v86.25,12.62 84.12,14.75 84.12,15.25 J1.11 | v92.38,11.88 97.12,7.12 TP11.TP | v13,47.12 13,48.25 U2.5 | v73.88,12.62 v68.75,17.75
  Bottom 0.15: v92.38,11.88 87,11.88 v86.25,12.62 v73.88,12.62 | v13,47.12 42.38,17.75 v68.75,17.75
EPD_RST  (via drill 0.3)
  Top 0.15: v85.5,14 84.62,14.88 84.62,15.25 J1.10 | v95.38,14 102.38,7 TP12.TP | v16.75,59.5 16.75,65.75 U2.21
  Bottom 0.15: v95.38,14 v85.5,14 72.62,14 69.38,17.25 8,17.25 8,51 8.38,51.38 11.38,51.38 11.38,54.12 v16.75,59.5
FLASH_CS  (via drill 0.3)
  Top 0.15: v131.75,8.75 131.12,8.12 R5.1 | v131.75,11 131,11.75 D9.1 | v21.88,59.5 33.12,59.5 U1.1 | v19.88,51.5 21.75,49.62 21.75,48.38 U2.12
  Bottom 0.15: v131.75,11 v131.75,8.75 132.5,8 138.38,8 138.75,8.38 138.75,31.5 105.5,31.5 91,46 21.12,46 19.88,47.25 v19.88,51.5 16.25,51.5 16.25,55.88 17.5,57.12 19.5,57.12 v21.88,59.5
GDR
  Top 0.15: 65.75,16.88 71.62,11 85.38,11 88.5,14.12 88.5,15.25 J1.2 | 65.75,16.88 65.75,18.5 R4.1 | 65.75,16.88 62.62,20 Q3.1
GND  (via drill 0.3)
  Top 0.15: J4.G2 15.75,85.12 16.5,84.38 16.5,81.38 15.75,80.62 15.75,79.62 J4.G1 15.38,79.5 8,72.12 | 8,72.12 8,65.88 U2.28 8,65.75 8,64.62 12.25,60.38 12.25,56.88 U2.29_3 12.38,56.88 13.5,56.88 U2.29_6 13.62,56.88 14.75,56.88 U2.29_9 14.88,56.75 14.88,55.62 | 32.5,56.88 33.12,56.25 33.12,55.88 U1.4 | 32.5,56.88 32.5,57.38 32.75,57.62 37.12,57.62 U1.9 | 12.38,54.38 12.38,55.5 U2.29_2 | 13.62,54.38 13.62,55.5 U2.29_5 | 12.38,54.38 13.5,54.38 U2.29_4 13.62,54.38 | 12.38,54.38 U2.29_1 12.25,54.25 10.75,54.25 v10.25,53.75 | 13.62,54.38 14.75,54.38 U2.29_7 14.88,54.38 14.88,55.5 U2.29_8 14.88,55.62 | v8,51.62 8,48.38 U2.1 | 32.5,56.88 20.62,56.88 19.38,55.62 14.88,55.62 | IC1.3 48.5,91.25 50.25,91.25 50.75,91.75 56.25,91.75 56.5,91.5 C_DELAY.2 | 61.5,107.5 62.12,106.88 62.38,106.88 CHANGE_BUTTON.1 62.5,106.88 65.88,106.88 CHANGE_BUTTON.2 66,106.88 66.62,107.5 68,107.5 68.62,106.88 72,106.88 | 61.5,107.5 60.88,108.12 C10.2 | 72,106.88 74.75,106.88 TP5.TP | 61.5,107.5 51.62,107.5 51,106.88 50.62,106.88 BOOT_BUTTON.2 50.5,106.88 47.12,106.88 BOOT_BUTTON.1 47,106.75 45.75,108 C6.2 45.62,108 29.12,108 28.62,107.5 26.38,107.5 25.75,106.88 | 72,106.88 56.62,91.5 C_DELAY.2 | 25.75,106.88 22.25,106.88 | 22.25,106.88 21.62,106.88 20.5,108 20.25,108 C5.2 20.12,108 18.25,108 16.88,106.62 TP4.TP 16.75,106.5 16.75,104.25 6.38,93.88 C9.2 6.25,93.75 2.38,89.88 J4.G4 2.5,89.75 2.5,89.38 4.5,87.38 4.62,87.38 5,87 | 22.25,106.88 RESET_BUTTON.1 | 5,87 1.38,83.38 1.38,76.75 J4.G3 1.38,76.62 v2.5,75.5 | 5,87 J4.P6 | 25.75,106.88 RESET_BUTTON.2 | v7.75,72.12 8,72.12 | 122.38,34.12 123.38,35.12 123.62,35.12 IC4.2
  Top 0.15: 122.38,34.12 121.62,33.38 119.12,33.38 119,33.5 115.5,33.5 R1_PWRUSB.1 | C1_BAT2.2 138.12,33.5 134.5,33.5 133.12,34.88 C3.- 133.12,35 v134.38,36.25 | J2.B12 164.12,51.5 164.12,51.38 J2.A1 164.12,51.25 164.12,48.88 | 164.75,49.5 164.12,48.88 | 164.12,48.88 155,39.75 149.25,39.75 147.75,41.25 v134.38,41.25 127.25,41.25 R2_BAT.1 | 164.12,48.88 J2.MP3 164.75,49.5 | 164.75,49.5 J2.MP1 168.62,59.62 J2.MP2 168.5,59.75 164.75,59.75 J2.MP4 | v122.75,33.75 122.38,34.12 | C10_SUPERCAP.1 97,54.25 96.62,53.88 92.25,53.88 C8.2 92.12,53.75 v89.5,53.75 | v83.25,49.88 81.75,48.38 | 81.75,48.38 77.5,44.12 77.5,39.5 D3.1 | v84.38,51 84.38,52.38 U3.13 | 105.88,44.38 112.38,50.88 115.5,50.88 116.75,49.62 C1_BAT.2 116.88,49.62 118.12,50.88 127.88,50.88 | 105.88,44.38 103,41.5 99.12,41.5 C7.2 | 136.75,52.25 136.88,52.38 U4.9 | 136.75,52.25 136.25,51.75 135.88,51.75 U4.4 | U4.9 136.88,52.5 136.25,53.12 135.88,53.12 U4.1 135.75,53.12 135.38,53.12 135.12,52.88 131.62,52.88 C2_BAT.2 131.5,52.75 129.75,52.75 127.88,50.88 | 136.75,52.25 137.75,52.25 U4.6 137.88,52.25 139.25,52.25 141,54 143.62,54 R2-USB1.1 143.75,54.12 145.25,54.12 147,55.88 151.12,55.88 D1.2 151.25,56 151.5,56 154.5,59 | 136.75,52.25 U4.9 | 127.88,50.88 127.38,50.38 127.38,49.75 127.88,49.25 128.25,49.25 MCP73831.2 | J2.B1 164.12,57.75 164.12,57.88 J2.A12 164.12,58 164.12,59.12 | 164.12,59.12 164.62,59.62 J2.MP4 | C5_USB.2 152.88,48.12 152.88,51.38 C4_USB.2 153,51.5 153,52.88 154.5,54.38 154.5,59 | 154.5,59 154.62,59.12 | 154.62,59.12 154.75,59.25 155.5,59.25 R2-USB.2 | 154.62,59.12 164.12,59.12 | 164.12,59.12 J2.MP4
  Top 0.15: 105.88,44.38 v98.75,51.5 | J1.17 81,15.38 81,16.5 79.62,17.88 EPD_C10.1 79.5,17.75 76.88,17.75 EPD_C11.1 | J1.MP2 76.62,12.88 76.62,17.62 76.75,17.75 EPD_C11.1 | EPD_C11.1 76.75,17.88 74.12,17.88 EPD_C12.1 74,17.88 73.38,18.5 67,18.5 R4.2 66.88,18.62 66.88,19 64.62,21.25 55.5,21.25 52.88,18.62 | 85.38,17.75 85.25,17.88 EPD_C8.1 | 85.38,17.75 85.5,17.62 85.5,15.38 J1.8 | 85.38,17.75 87.88,17.75 EPD_C7.1 88,17.88 90.62,17.88 EPD_C6.1 | 85.38,17.75 EPD_C8.1 | EPD_C9.1 82.5,18 85.12,18 EPD_C8.1 | EPD_C6.1 90.62,17.75 90.12,17.25 90.12,12.88 J1.MP1 90,12.75 87.62,12.75 85.5,10.62 60.25,10.62 57.62,13.25 R2.1 57.5,13.25 55.75,13.25 55,12.5 53.62,12.5 52.88,13.25 52.88,13.5 SJ1.1 52.88,13.62 52.88,18.62 | EPD_C6.1 90.75,17.88 93.5,17.88 EPD_C5.1 93.5,18 v95.88,18 | 52.88,18.62 52.88,27.25 EPD_C2.1 | C2.2 149,5 152.5,5 C1.2 152.62,5.12 v152.62,6.5 | SENSOR2.1 153.38,13.12 153.38,12.5 154.12,11.75 154.12,10.25 SENSOR2.7 | 154.38,9.75 154.25,9.88 154.25,10.12 SENSOR2.7 | 154.38,9.75 154.62,9.5 155.38,9.5 155.75,9.88 155.75,10.12 SENSOR2.5 155.88,10.25 163.25,17.62 165.12,17.62 J3.1 | 154.38,9.75 v153.88,9.25 | 154.38,9.75 SENSOR2.7 | 119.25,29.25 119.88,29.25 120.5,29.88 C1_BAT1.2 120.62,30 v122.75,32.12 | 119.25,29.25 118.75,29.25 115.75,32.25 99.38,32.25 EPD_C1.1 99.25,32.25 99,32 v99,20.62 | 119.25,29.25 119.25,13.12 D12.2 119.25,13 123.25,13 D11.2 123.38,13.12 127.12,13.12 D10.2 127.25,13.25 130.88,13.25 D9.2 131,13.38 131.12,13.5 135.12,13.5 D6.2 135.25,13.62 138.88,13.62 D8.2 139,13.5 v139.75,12.75 | 81.75,48.38 56.62,73.5 56.62,91.38 C_DELAY.2
  Bottom 0.15: v8,51.62 10.12,53.75 v10.25,53.75 | v7.75,72.12 4.38,75.5 v2.5,75.5 | v134.38,41.25 v134.38,36.25 132,33.88 122.88,33.88 v122.75,33.75 v122.75,32.12 | v83.25,49.88 v84.38,51 84.88,51.5 87.25,51.5 v89.5,53.75 91.75,51.5 v98.75,51.5 | 152.62,9.25 v152.62,6.5 | v153.88,9.25 152.62,9.25 | 152.62,9.25 149.12,12.75 v139.75,12.75 | v95.88,18 98.5,20.62 v99,20.62
  pour Top: 0,111.2 19.35,111.2 19.35,109.15 69.15,109.15 69.15,111.2 92.2,111.2 92.2,67.2 170.2,67.2 170.2,0 92.2,0 92.2,10 74,10 74,0 0,0 0,47.2 6.7,47.2 6.7,66.95 0,66.95
GPIO8
  Top 0.15: R1.2 19.38,45.38 19.38,48.25 U2.10
I2C_PW  (via drill 0.3)
  Top 0.15: SENSOR2.6 154.88,10.25 154.88,12.12 154.25,12.75 154.25,13.12 SENSOR2.2 154.25,13.25 153.62,13.88 153,13.88 152.88,13.75 152.88,12.5 153.25,12.12 153.25,10.25 SENSOR2.8 153.38,10.12 v153.38,8.62 | C2.1 149,3.75 152.5,3.75 C1.1 152.62,3.75 155,3.75 156.12,4.88 R2-PINH.2 156.25,5 156.62,5 | 156.62,5 159.38,5 R1_PINH.2 | v21.88,64.62 21.88,65.75 U2.17 | 156.62,5 v165,13.38
  Bottom 0.15: v21.88,64.62 27.62,58.88 133.62,58.88 165,27.5 v165,13.38 165,11.62 157.38,4 156.5,4 156.5,5.5 v153.38,8.62
INT_RTC  (via drill 0.3)
  Top 0.15: v95,61.12 93.75,61.12 R1_PINH1.1 | v96.38,61.38 97.38,61.38 97.62,61.12 TP15.TP | v21.62,53.88 16.88,49.12 16.88,48.38 U2.8 | v84.38,57.62 84.38,60.12 84.88,60.62 | 84.88,60.62 85.62,61.38 85.62,61.75 U3.3 | 84.88,60.62 v85,60.5
  Bottom 0.15: v96.38,61.38 95.25,61.38 v95,61.12 94.38,60.5 v85,60.5 | v21.62,53.88 21.75,54 80.75,54 v84.38,57.62
IO/BOOT  (via drill 0.3)
  Top 0.15: R_BOOT.2 52,108.12 50.75,108.12 50.62,108.25 BOOT_BUTTON.3 50.5,108.38 47.12,108.38 BOOT_BUTTON.4 47.12,108.25 47.75,107.62 v48.12,107.62 | v44.88,107.12 45.12,106.88 45.62,106.88 C6.1 | v24.5,67.62 24.5,65.88 U2.15
  Bottom 0.15: v44.88,107.12 45.38,107.62 45.62,107.62 | v48.12,107.62 45.62,107.62 | v24.5,67.62 64,107.12 64,107.88 51.62,107.88 48.62,104.88 48.38,104.88 45.62,107.62
IO/CHANGE  (via drill 0.3)
  Top 0.15: R_CHANGE.2 67.38,108.25 66,108.25 CHANGE_BUTTON.3 65.88,108.25 62.62,108.25 | v59.88,107 60.75,107 C10.1 | 62.62,108.25 62.5,108.38 CHANGE_BUTTON.4 62.62,108.25 | 62.62,108.25 v63.5,107.38 | v14.25,67 14.25,65.88 U2.23
  Bottom 0.15: v63.5,107.38 60.25,107.38 v59.88,107 54.25,107 v14.25,67
MISO  (via drill 0.3)
  Top 0.15: v3.88,89.12 4.88,88.12 5.25,88.12 J4.P7 | v3.88,92.88 2.38,94.38 TP6.TP | v118.25,7.62 119,7.62 R8.1 | D12.1 119.25,11.5 v118.25,10.5 116.88,10.5 107.25,20.12 98.88,20.12 v87.88,31.12 | v18.5,58.38 33.12,58.38 U1.2 | 10.12,64.5 9.25,65.38 9.25,65.75 U2.27 | 10.12,64.5 v11.88,62.75 | 10.12,64.5 v10.25,64.62
  Bottom 0.15: v3.88,92.88 v3.88,89.12 10.25,82.75 v10.25,64.62 | v118.25,10.5 v118.25,7.62 | 17.38,59.5 14.12,62.75 v11.88,62.75 | 17.38,59.5 v18.5,58.38 | v87.88,31.12 73.38,45.62 21,45.62 15.88,50.75 15.88,58.12 16,58.12 17.38,59.5
MOSI  (via drill 0.3)
  Top 0.15: v82.62,11.62 82.62,15.25 J1.14 | v122.38,11 122.75,11 123.25,11.5 D11.1 | v124.12,7.88 123.25,7.88 R7.1 | v123.12,6.5 123.12,3.75 TP7.TP | v19,52 15.62,48.62 15.62,48.38 U2.7 | U1.5 41,55.75 40,55.75 v36.25,52 31.62,52 23,43.38 21.25,43.38 | v6.62,68.12 6.75,68.25 6.75,82.88 6.12,83.5 5.38,83.5 J4.P3 | v8,52.25 7.12,51.38 7.12,47.5 11.25,43.38 21.25,43.38 | 21.25,43.38 v53,11.62
  Bottom 0.15: v122.38,11 121,11 | 121,11 83.25,11 v82.62,11.62 v53,11.62 | 121,11 123.12,8.88 | 123.12,8.88 v124.12,7.88 | 123.12,8.88 v123.12,6.5 | v19,52 v36.25,52 | v6.62,68.12 9.38,65.38 9.38,53.5 9.25,53.5 v8,52.25
N$1  (via drill 0.3)
  Top 0.15: v145.88,55.38 143.75,55.38 R2-USB1.2 | v163.12,53.25 164,53.25 J2.A5
  Bottom 0.15: v145.88,55.38 148,53.25 v163.12,53.25
N$2
  Top 0.15: R2-USB.1 155.62,58 161.88,58 163.5,56.38 164,56.38 J2.B5
N$3  (via drill 0.3)
  Top 0.15: IC4.3 123.75,34.38 124,34.62 124.12,34.62 124.38,34.88 124.38,35.62 123.75,36.25 IC4.1 123.62,36.12 121.38,36.12 D2.1 120,34.62 v119.25,33.88 | v119.25,32.38 119.25,30 C1_BAT1.1 | v133.12,43.25 134.12,43.25 Q1.2
  Bottom 0.15: v119.25,32.38 v119.25,33.88 119.62,34.25 124.12,34.25 v133.12,43.25
N$4  (via drill 0.3)
  Top 0.15: C4.1 94.12,37.25 92.88,37.25 91.5,38.62 88,38.62 87.38,38 D4.1 87.25,37.88 v86.5,38.62 | v81,38.62 81,39.5 D3.2
  Bottom 0.15: v86.5,38.62 v81,38.62
N$5  (via drill 0.35)
  other vias: 36.7,90.8 34.9,90.8 33.1,90.8 31.3,90.8 29.5,90.8 27.7,90.8 25.9,90.8 24.1,90.8 22.3,90.8 38.5,89 34.9,89 33.1,89 31.3,89 29.5,89 27.7,89 25.9,89 24.1,89 22.3,89 38.5,87.2 36.7,87.2 33.1,87.2 31.3,87.2 29.5,87.2 27.7,87.2 25.9,87.2 24.1,87.2 22.3,87.2 38.5,85.4 36.7,85.4 34.9,85.4 31.3,85.4 29.5,85.4 27.7,85.4 25.9,85.4 24.1,85.4 22.3,85.4 38.5,83.6 36.7,83.6 34.9,83.6 33.1,83.6 29.5,83.6 34.9,72.8 33.1,72.8 31.3,72.8 27.7,72.8 25.9,72.8 24.1,72.8 22.3,72.8 36.7,72.8 38.5,72.8 24.1,74.6 25.9,74.6 27.7,74.6 29.5,74.6 33.1,74.6 34.9,74.6 36.7,74.6 38.5,74.6 22.3,76.4 25.9,76.4 27.7,76.4 29.5,76.4 31.3,76.4 34.9,76.4 36.7,76.4 38.5,76.4 22.3,78.2 24.1,78.2 27.7,78.2 29.5,78.2 31.3,78.2 33.1,78.2 36.7,78.2 38.5,78.2 22.3,80 24.1,80 25.9,80 29.5,80 31.3,80 33.1,80 34.9,80 38.5,80 22.3,81.8 24.1,81.8 25.9,81.8 27.7,81.8 31.3,81.8 33.1,81.8 34.9,81.8 36.7,81.8 22.3,83.6 24.1,83.6 25.9,83.6 27.7,83.6
N$6  (via drill 0.3)
  Top 0.15: v121.62,46.5 121.62,45.75 R1_BAT.1 | v128.5,47.5 128.5,48 128.38,48.12 MCP73831.1
  Bottom 0.15: v121.62,46.5 122.62,47.5 v128.5,47.5
N$7  (via drill 0.3)
  Top 0.15: v122,50.38 121.38,49.75 CHG_LED.C | v122,47.5 122,46.75 123,45.75 R1_BAT.2
  Bottom 0.15: v122,47.5 v122,50.38
N$8
  Top 0.15: R2_BAT.2 127.25,46.62 125.75,48.12 MCP73831.5
N$10  (via drill 0.3)
  Top 0.15: v77.5,16.12 77.5,15.38 J1.24 | v74.75,18.5 74.12,19.12 EPD_C12.2
  Bottom 0.15: v77.5,16.12 75.12,18.5 v74.75,18.5
N$11  (via drill 0.3)
  Top 0.15: v78.62,17.25 78.62,15.38 J1.22 | v78.75,18.25 79.5,19 EPD_C10.2
  Bottom 0.15: v78.62,17.25 78.62,18.25 v78.75,18.25
N$12  (via drill 0.3)
  Top 0.15: v80.12,16.25 80.12,15.38 J1.19 | v87.12,19 87.88,19 EPD_C7.2
  Bottom 0.15: v80.12,16.25 80.38,16.5 84.62,16.5 v87.12,19
N$13  (via drill 0.3)
  Top 0.15: v80,16.88 79.62,16.5 79.62,15.38 J1.20 | v83.75,19.12 85.12,19.12 EPD_C8.2
  Bottom 0.15: v80,16.88 82.25,19.12 v83.75,19.12
N$14  (via drill 0.3)
  Top 0.15: v74.75,17.12 74.75,13.75 76.38,12.12 77.75,12.12 80.5,14.88 80.5,15.25 J1.18 | v84.75,20.12 89.62,20.12 90.62,19.12 EPD_C6.2
  Bottom 0.15: v74.75,17.12 74.12,17.75 74.12,20.12 v84.75,20.12
N$15  (via drill 0.3)
  Top 0.15: v87,16.12 87,15.38 J1.5 | v54.25,20.62 54.25,27.25 53,28.5 EPD_C2.2
  Bottom 0.15: v87,16.12 86.25,15.38 71.75,15.38 66.5,20.62 v54.25,20.62
N$16  (via drill 0.3)
  Top 0.15: v87.62,16.12 87.62,15.38 J1.4 | v91.5,24.75 v91.5,19.62 | v100.25,33.5 99.38,33.5 EPD_C1.2
  Bottom 0.15: v87.62,16.12 91.12,19.62 v91.5,19.62 | v100.25,33.5 v91.5,24.75
N$17
  Top 0.15: IC1.5 51.25,93 56.25,93 56.5,92.75 C_DELAY.1
N$18  (via drill 0.3)
  Top 0.15: v87.38,65.62 87.38,64.88 R_CAPACITOR.1 | v87,66.88 87,67.62 D7.1
  Bottom 0.15: v87.38,65.62 87.38,66.88 v87,66.88
PREVGH  (via drill 0.3)
  Top 0.15: v79.12,16.62 79.12,15.38 J1.21 | v81.62,19.12 82.25,19.12 82.38,19.25 EPD_C9.2 82.5,19.25 87.38,24.12 87.38,32.38 D5.1
  Bottom 0.15: v81.62,19.12 v79.12,16.62
PREVGL  (via drill 0.3)
  Top 0.15: v78,16.5 78,15.38 J1.23 | v76.12,18.38 EPD_C11.2 77.5,19.75 v77.5,21.62 | v90.75,33.75 90.75,37.88 D4.2
  Bottom 0.15: v76.12,18.38 v78,16.5 | v90.75,33.75 90.75,21.62 v77.5,21.62
RESE  (via drill 0.3)
  Top 0.15: v86.75,13 88,14.25 88,15.25 J1.3 | v70.12,13.12 67,16.25 66.88,16.25 66.25,16.88 66.25,19.12 65.38,20 63.88,20 Q3.2 63.75,20.12 63,20.88 62.25,20.88 60,18.62 55.5,18.62 R3.1
  Bottom 0.15: v86.75,13 86.62,13.12 v70.12,13.12
RESE'
  Top 0.15: 54.25,14.62 54.25,13.62 SJ1.2 | 54.25,14.62 54.25,18.5 R3.2 | 54.25,14.62 57.5,14.62 R2.2
RESET  (via drill 0.3)
  Top 0.15: R_RESET.1 28.12,108.25 25.75,108.25 RESET_BUTTON.3 25.75,108.38 22.25,108.38 RESET_BUTTON.4 22.25,108.25 22.12,108.12 v21.12,108.12 | v21.12,106.75 20.25,106.75 C5.1 | v34.75,93.12 48.38,93.12 IC1.1 | v10.25,61.75 9.75,61.25 9.75,53.62 10.38,53 10.38,48.38 U2.3
  Bottom 0.15: v21.12,108.12 v21.12,106.75 | v21.12,106.75 v34.75,93.12 | v10.25,61.75 13.75,65.25 13.75,106.75 v21.12,106.75
RTC_RST  (via drill 0.3)
  Top 0.15: v23.25,64.62 23.25,65.75 U2.16 | v85,63.12 85,62.38 84.5,61.88 U3.4
  Bottom 0.15: v23.25,64.62 24.75,63.12 v85,63.12
RX
  Top 0.15: U2.24 13,65.88 13,68.88 16.5,72.38 TP2.TP
SCK  (via drill 0.3)
  Top 0.15: v85.62,11.88 83.12,14.38 83.12,15.25 J1.13 | v126.25,11.5 127,11.5 127.12,11.62 D10.1 | v126.25,7.75 127.12,7.75 R6.1 | v127,6.5 127,3.88 TP8.TP | v41.88,57 41.12,57 U1.6 | v16.75,54.25 16.75,51.88 14.25,49.38 14.25,48.38 U2.6 | v4,70.12 4,85.12 4.62,85.75 5.25,85.75 J4.P5 | v17.38,56.12 v8.88,64.62
  Bottom 0.15: v127,6.5 127,7.75 v126.25,7.75 v126.25,11.5 122.25,11.5 122.12,11.38 86.12,11.38 v85.62,11.88 85.38,12.12 12.62,12.12 7.5,17.25 7.5,64.62 v8.88,64.62 8.88,65.38 6.88,67.38 6.75,67.38 v4,70.12 | v41.88,57 41.62,56.75 19.25,56.75 18,55.5 | v16.75,54.25 18,55.5 | 18,55.5 v17.38,56.12
SCL  (via drill 0.3)
  Top 0.15: v164.5,21.38 165.12,20.75 J3.4 | U4.7 137.88,52.75 v139.12,52.75 139.12,53.38 138.75,53.75 v98.75,53.75 | v157,4.5 156.25,3.75 R2-PINH.1 | v157,12 155.88,13.12 SENSOR2.4 | v18.12,64.62 18.12,65.75 U2.20 | v87.5,53.75 87.5,53.12 88.12,52.5 U3.16
  Bottom 0.15: v139.12,52.75 164.5,27.38 v164.5,21.38 164.5,11.62 161,8.12 | v157,4.5 159.88,7.38 160.25,7.38 161,8.12 | v157,12 160.88,8.12 161,8.12 | v18.12,64.62 24.62,58.12 84.5,58.12 | 84.5,58.12 87.5,55.12 v87.5,53.75 | v98.75,53.75 94.38,58.12 84.5,58.12
SDA  (via drill 0.3)
  Top 0.15: v160.12,7.88 160.12,4.5 159.5,3.88 R1_PINH.1 | v155.62,12.25 155,12.88 155,13.12 SENSOR2.3 | v138.62,53.25 137.88,53.25 U4.8 | v148.25,36.25 164.75,19.75 165.12,19.75 J3.3 | v19.38,64.62 19.38,65.75 U2.19 | v87,51 87,52.38 U3.15
  Bottom 0.15: v160.12,7.88 155.75,12.25 v155.62,12.25 148.25,19.62 v148.25,36.25 138.62,36.25 v138.62,53.25 133.38,58.5 99.25,58.5 | v19.38,64.62 25.5,58.5 99.25,58.5 | v87,51 98.88,51 99.25,51.38 99.25,58.5
SRC  (via drill 0.3)
  Top 0.15: v93.25,38.5 94.12,38.5 C4.2 | v91.88,32.62 91.12,32.62 D5.2 | v70.38,22.25 63.25,22.25 Q3.3 | v78.22,33.15 76.46,35.29 L1.1
  Bottom 0.15: 93.25,34.25 93.25,32.62 v91.88,32.62 | 93.25,34.25 v93.25,38.5 | v70.38,22.25 78.75,30.62 80.75,30.62 | 80.75,30.62 88,30.62 90.25,32.88 90.25,34.25 93.25,34.25 | 80.75,30.62 v78.22,33.15
SS_SD  (via drill 0.3)
  Top 0.15: v138.25,8.5 138.88,7.88 R10.1 | v138.25,11.25 139,12 D8.1 | 11.62,49.38 11.62,53 v10.88,53.75 | 11.62,49.38 11.62,48.38 U2.4 | v6.25,80.75 6.25,81.88 5.75,82.38 J4.P2 | 11.62,49.38 v13.62,49.38
  Bottom 0.15: v138.25,8.5 v138.25,11.25 128.38,21.12 41.88,21.12 v13.62,49.38 | v10.88,53.75 10.88,61.25 10.12,61.25 9.75,61.62 9.75,80.75 v6.25,80.75
TX
  Top 0.15: U2.25 11.75,65.88 11.75,70.62 13.38,72.25 TP1.TP
USB_D+  (via drill 0.3)
  Top 0.15: v105.25,56.88 151.12,56.88 D1.1 | v25.25,48.88 25,48.88 24.5,48.38 U2.14
  Bottom 0.15: v105.25,56.88 97.25,48.88 v25.25,48.88
USB_D-  (via drill 0.3)
  Top 0.15: v137.62,46 146.62,55 151.12,55 D1.3 | v24,47.12 23.25,47.88 23.25,48.25 U2.13
  Bottom 0.15: v137.62,46 91.5,46 90.38,47.12 v24,47.12
VBAT
  Top 0.3: Q1.3 133.31,45.47 133.31,47.96 133.93,48.58 TP3.TP 133.93,48.72 133.93,52.18 | U4.2 135.8,52.67 135.8,52.25 U4.3 135.66,52.18 133.93,52.18 | MCP73831.3 128.32,50.1 129.71,51.49 131.51,51.49 C2_BAT.1 131.64,51.63 132.2,52.18 133.93,52.18
VBUS
  Top 0.3: D1.5 153.67,55.92 153.25,55.92 152.07,54.74 152.07,51.84 151.8,51.56 C4_USB.1 151.66,51.42 151.66,48.03 C5_USB.1 151.59,47.89 149.09,45.4 149.09,42.56 | 149.09,42.56 149.09,40.41 149.3,40.2 151.03,40.2 153.11,42.28 154.63,42.28 PFMF.050.1.2 | R1_PWRUSB.2 115.44,34.94 117.72,34.94 119.46,36.67 119.87,36.67 D2.2 119.87,36.88 119.87,49.48 | 125.41,49.76 122.85,49.76 CHG_LED.A 122.64,49.76 121.95,49.07 120.77,49.07 120.36,49.48 119.87,49.48 | 125.41,49.76 125.69,50.04 MCP73831.4 | 125.41,49.76 131.85,43.32 132.27,43.32 Q1.1 132.41,43.25 133.1,42.56 149.09,42.56 | 119.87,49.48 118.14,49.48 C1_BAT.1 118,49.41 117.38,48.79 116.34,48.79 115.58,49.55 TP14.TP
VRTC
  Top 0.3: C10_SUPERCAP.2 97.09,52.11 96.67,52.53 92.24,52.53 C8.1 92.1,52.6 89.89,52.6 87.74,54.74 87.6,54.81 | 87.6,54.81 87.6,62.85 88.71,63.95 88.71,64.79 R_CAPACITOR.2 | 87.6,54.81 85.73,52.94 85.73,52.53 U3.14
VUSB
  Top 0.3: J2.A9 164.12,57.1 164.12,56.89 J2.B4 164.26,56.82 164.81,56.82 165.02,56.62 165.02,52.6 164.81,52.39 164.26,52.39 J2.B9 164.12,52.32 164.12,52.11 J2.A4 163.98,52.04 159.9,52.04 150.2,42.35 PFMF.050.1.1